# EAGLE board esp-12f_power_meter (EAGLE 6.1)
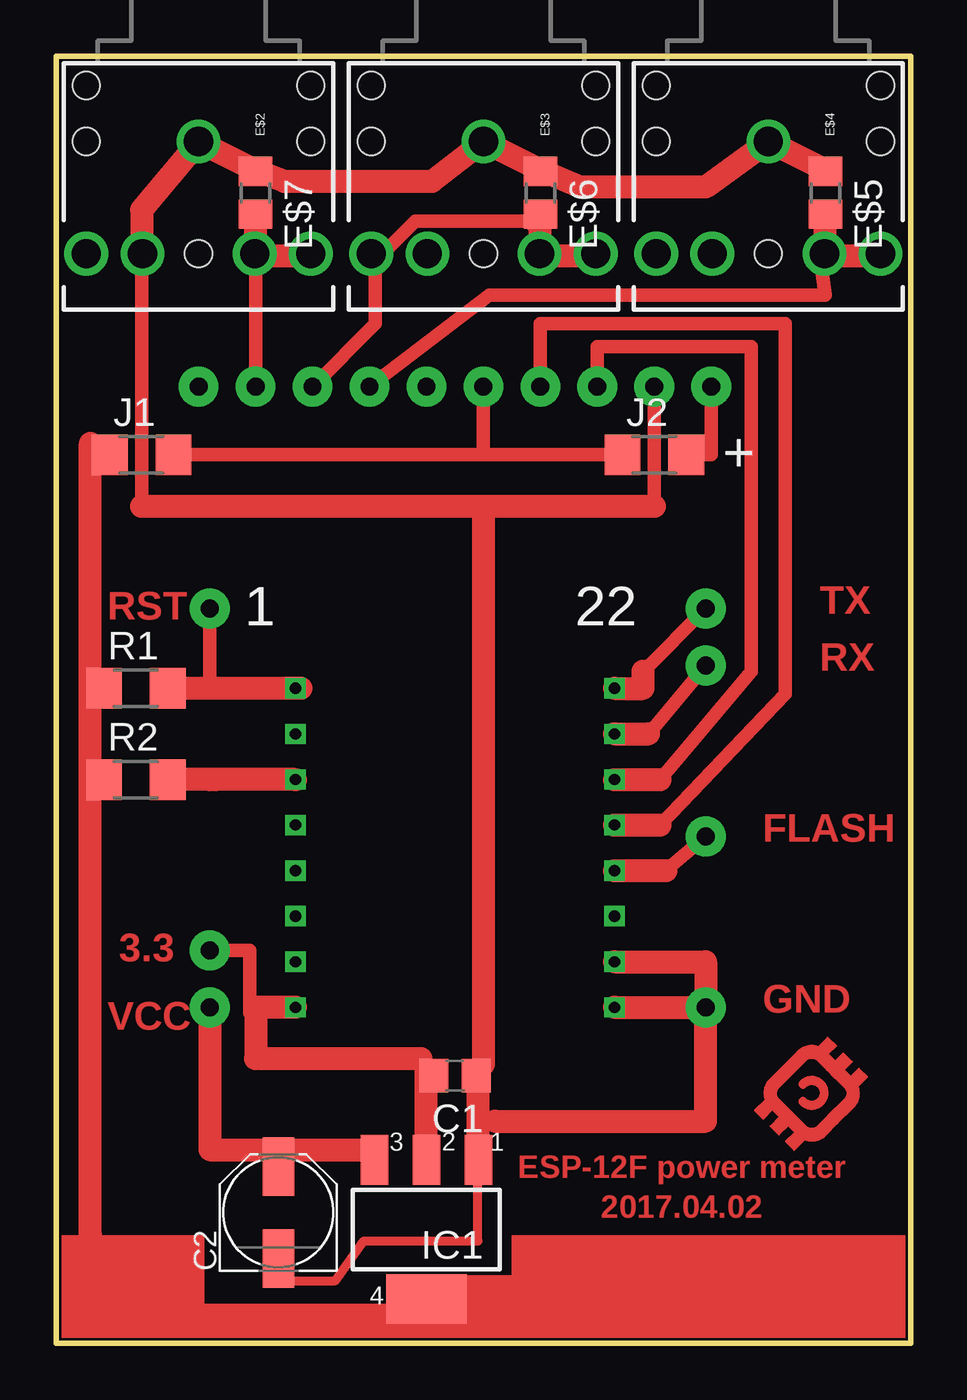
[diagram p0: board, top side]

Size 38.1 x 57.4 mm. Coordinates in mm from the lower left corner, seen from the top.
Outline: 0,0 38.1,0 38.1,57.4 0,57.4 0,0
Copper layers (1*16): Top 0.035mm / dielectric 1.5mm / Bottom 0.035mm
Design rules: minimum track width 10mil, minimum drill 24mil, track to track 8mil, track to pad 8mil, pad to pad 8mil, via to via 8mil, smd to smd 8mil, copper to edge 40mil, drill to drill 8mil, minimum pad ring 10mil, minimum via ring 8mil, stop-mask expansion 4mil, vias tented up to drill 0mil, thermal gap 10mil

## Footprints (pad centres in the part's own frame; a part is rotated, then mirrored left to right if it is on the bottom)
C0805 = smd 1.3 x 1.5: 1 -0.95,0; 2 0.95,0
PANASONIC_C = smd 2.6 x 1.4: + 2.05,0; - -2.05,0
AUDIO-JACK = drill 1.3: 1 0,0; 2 5,5; 3 5,2.5; 4 5,-2.5; 5 5,-5 | hole 1.2: 0,5; -2.5,5; -2.5,-5; 0,-5; 5,0
R0805 = smd 1.3 x 1.5: 1 -0.95,0; 2 0.95,0
SOT223 = smd 1.219 x 2.235: 1 -2.311,-3.099; 2 0,-3.099; 3 2.311,-3.099 | smd 3.6 x 2.2: 4 0,3.099
R1206 = smd 1.6 x 1.803: 1 -1.422,0; 2 1.422,0

## Placement (x,y rotation side)
C1  [C0805]  17.78,11.94 180 top
C2  5uF  [PANASONIC_C]  9.91,5.84 90 top
E$2  [AUDIO-JACK]  6.35,53.59 270 top
E$3  [AUDIO-JACK]  19.05,53.59 270 top
E$4  [AUDIO-JACK]  31.75,53.59 270 top
E$5  [R0805]  34.29,51.31 270 top
E$6  [R0805]  21.59,51.31 270 top
E$7  [R0805]  8.89,51.31 270 top
E$8  [OPEN_HARDWARE_LOGO]  33.53,11.18 0 top
IC1  LD1117  [SOT223]  16.51,5.08 180 top
J1  [R1206]  3.81,39.62 0 top
J2  [R1206]  26.67,39.62 0 top
R1  5K  [R1206]  3.56,29.21 0 top
R2  5K  [R1206]  3.56,25.15 0 top

## Library data of the parts
C1 C2 E$5-E$7 J1 J2 R1 R2 = rcl
E$2-E$4 = SparkFun
E$8 = openhardwarelogo
IC1 = linear

## Nets
S$32: E$3.1 E$4.1

## Tracks (layer width: path | path; a pad name or v marks a point on that pad's centre or on a via)
S$1  (via drill 0.5 pad 0.25)
  Top 1.016: v10.67,25.15 7.11,25.15 6.86,25.15 5.08,25.15
S$2
  Top 1.016: 16.51,8.38 16.51,12.19
S$3  (via drill 0.5 pad 0.25, 0.8 pad 1.78)
  Top 0.61: 26.16,29.97 v28.96,32.77
  Top 1.016: v24.89,29.21 26.16,29.21 26.16,29.97
S$4
  Top 1.016: 10.92,29.21 5.08,29.21
S$6  (via drill 0.5 pad 0.25)
  other vias: 10.67,29.21
S$8  (via drill 0.8 pad 1.78)
  Top 0.61: v8.89,42.67 8.89,48.51
  Top 1.016: 11.68,48.51 8.89,48.51 8.89,49.78
S$9
  Top 0.406: 9.65,2.79 12.45,2.79 13.72,4.57 18.8,4.57 18.8,7.11
S$11  (via drill 0.5 pad 0.25)
  Top 1.016: v10.67,14.99 8.89,14.99 8.89,12.7
S$12  (via drill 0.5 pad 0.25)
  other vias: 10.67,27.18
S$13
  Top 1.016: 9.14,12.7 16.26,12.7
S$14
  Top 1.016: 1.52,4.83 1.52,40.13
S$15  (via drill 0.5 pad 0.25)
  other vias: 10.67,23.11
S$16
  Top 1.016: 18.8,12.19 18.8,7.62
S$17  (via drill 0.5 pad 0.25)
  other vias: 10.67,21.08
S$18  (via drill 0.5 pad 0.25)
  other vias: 10.67,19.05
S$19  (via drill 0.5 pad 0.25)
  other vias: 10.67,17.02
S$21  (via drill 0.8 pad 1.78)
  other vias: 6.35,42.67
S$23  (via drill 0.8 pad 1.78)
  Top 0.61: 8.64,14.73 8.64,17.53 v6.86,17.53 | v6.86,32.77 6.86,29.21
S$24
  Top 1.016: 24.38,48.26 24.13,48.51 21.59,48.51 21.59,49.78
S$25
  Top 1.016: 36.83,48.51 34.29,48.51 34.29,49.78
S$26  (via drill 0.8 pad 1.78)
  other vias: 16.51,42.67
S$27  (via drill 0.5 pad 0.25, 0.8 pad 1.78)
  Top 0.61: v24.13,42.67 24.13,44.45 30.99,44.45 30.99,29.97 26.92,25.15
  Top 1.016: v24.89,25.15 26.92,25.15
S$28  (via drill 0.8 pad 1.78)
  Top 0.61: 21.34,49.78 21.08,50.04 16,50.04 14.22,48.26 14.22,45.47 v11.43,42.67
S$29  (via drill 0.5 pad 0.25)
  other vias: 24.89,19.05
S$30  (via drill 0.5 pad 0.25, 0.8 pad 1.78)
  Top 0.61: 27.18,21.08 v28.96,22.61
  Top 1.016: v24.89,21.08 27.18,21.08
S$31  (via drill 0.5 pad 0.25, 0.8 pad 1.78)
  Top 0.61: v21.59,42.67 21.59,45.47 32.51,45.47 32.51,28.96 26.92,23.11
  Top 1.016: v24.89,23.11 26.92,23.11
S$32  (via drill 0.8 pad 1.78)
  Top 0.61: 26.67,37.34 v26.67,42.67 | 3.81,48.51 3.81,37.34
  Top 1.016: 19.05,37.34 26.67,37.34 | 6.1,53.59 6.35,53.59 | 6.35,53.59 3.81,50.55 3.81,48.51 | 6.35,53.59 8.89,52.32 10.16,51.82 16.76,51.82 E$3.1 21.59,52.32 23.37,51.56 28.96,51.56 E$4.1 | E$4.1 31.75,53.85 | 34.29,52.32 E$4.1 | 3.81,37.34 19.05,37.34 | 19.05,37.34 19.05,12.45
S$33  (via drill 0.5 pad 0.25, 0.8 pad 1.78)
  Top 0.61: 26.42,27.18 v28.96,30.23
  Top 1.016: v24.89,27.18 26.42,27.18
S$34  (via drill 0.8 pad 1.78)
  Top 0.61: 34.04,48.51 34.29,46.74 19.3,46.74 v13.97,42.67
S$35  (via drill 0.8 pad 1.78)
  Top 1.016: v6.86,14.99 6.86,8.64 13.97,8.64
S$36  (via drill 0.5 pad 0.25, 0.8 pad 1.78)
  Top 1.016: v28.96,14.99 28.96,17.02 v24.89,17.02 | v24.89,14.99 v28.96,14.99 | 19.56,9.91 28.96,9.91 v28.96,14.99
S$37  (via drill 0.8 pad 1.78)
  Top 0.61: 5.59,39.37 5.84,39.62 19.05,39.62 | 19.05,39.62 v19.05,42.67 19.05,42.93 | 19.05,39.62 24.38,39.62
S$38  (via drill 0.8 pad 1.78)
  Top 0.61: 28.7,39.62 29.21,39.62 v29.21,42.67
(copper drawn outside any net)
  shapes: Top area x7

## Text on the board
Top: TX | RST | RX | FLASH | 3.3 | GND | VCC | ESP-12F power meter | 2017.04.02
tPlace: + | 1 | 22